# Altium PCB CC1200.PcbDoc
Units mm, origin at the board's own origin, x right, y up, seen from the top; angles counter-clockwise.
Board outline 17.96 x 18.82 mm, 2 copper layers (Top Layer, Bottom Layer); 43 components, 29 nets, 128 pads, 62 vias.
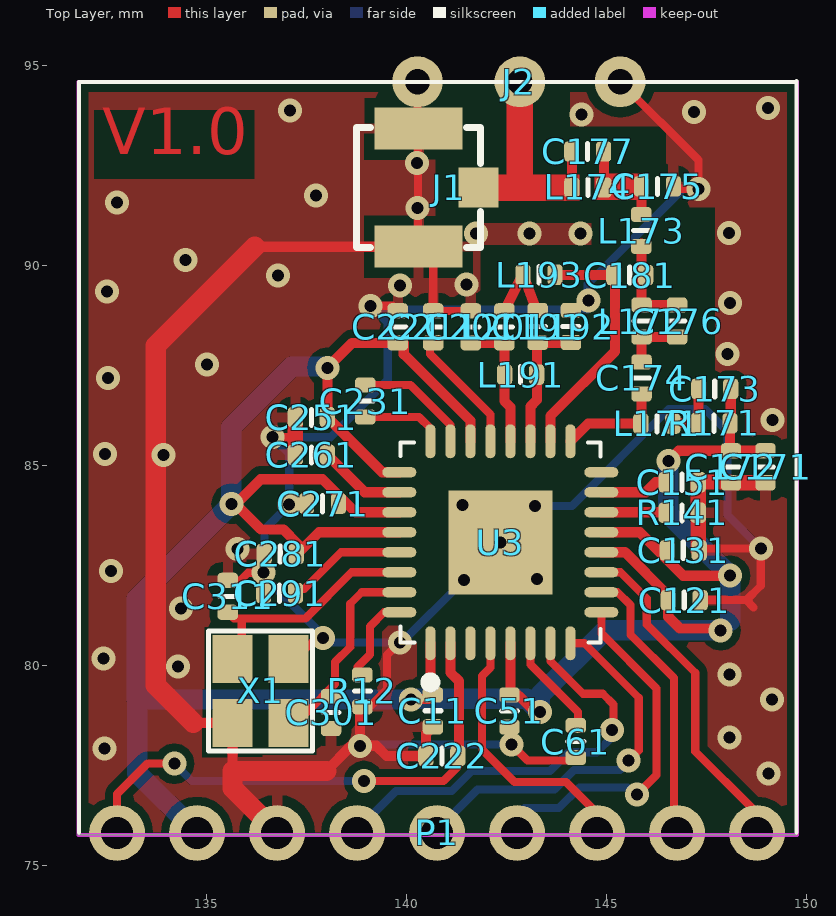
[diagram p0: Top Layer view]
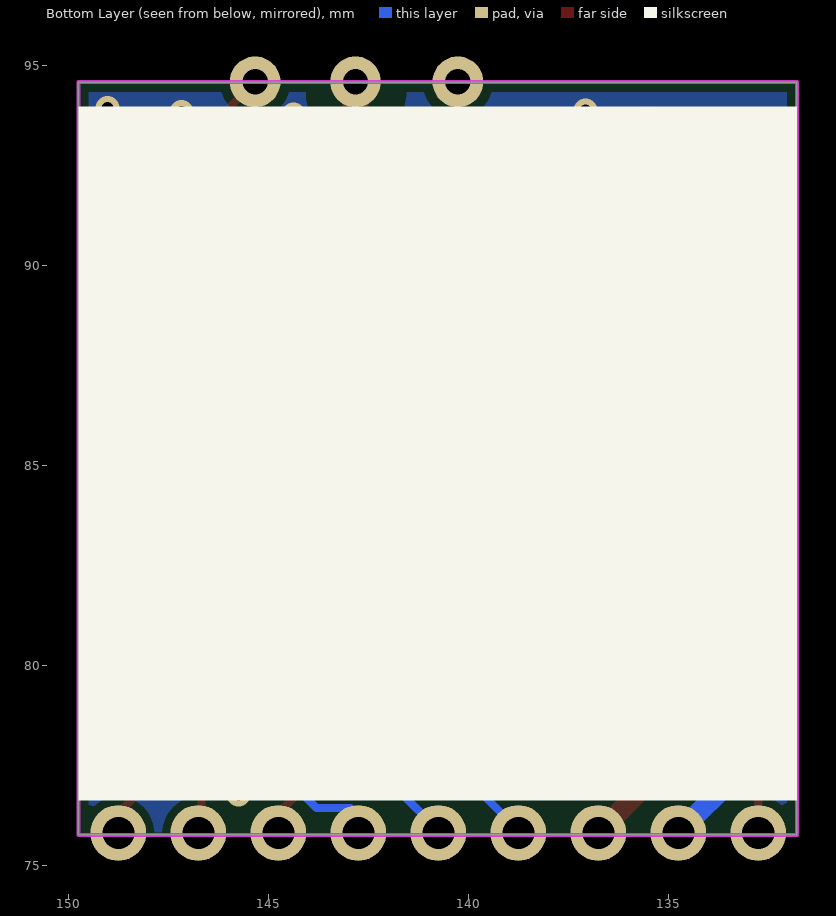
[diagram p1: Bottom Layer view, seen from below]
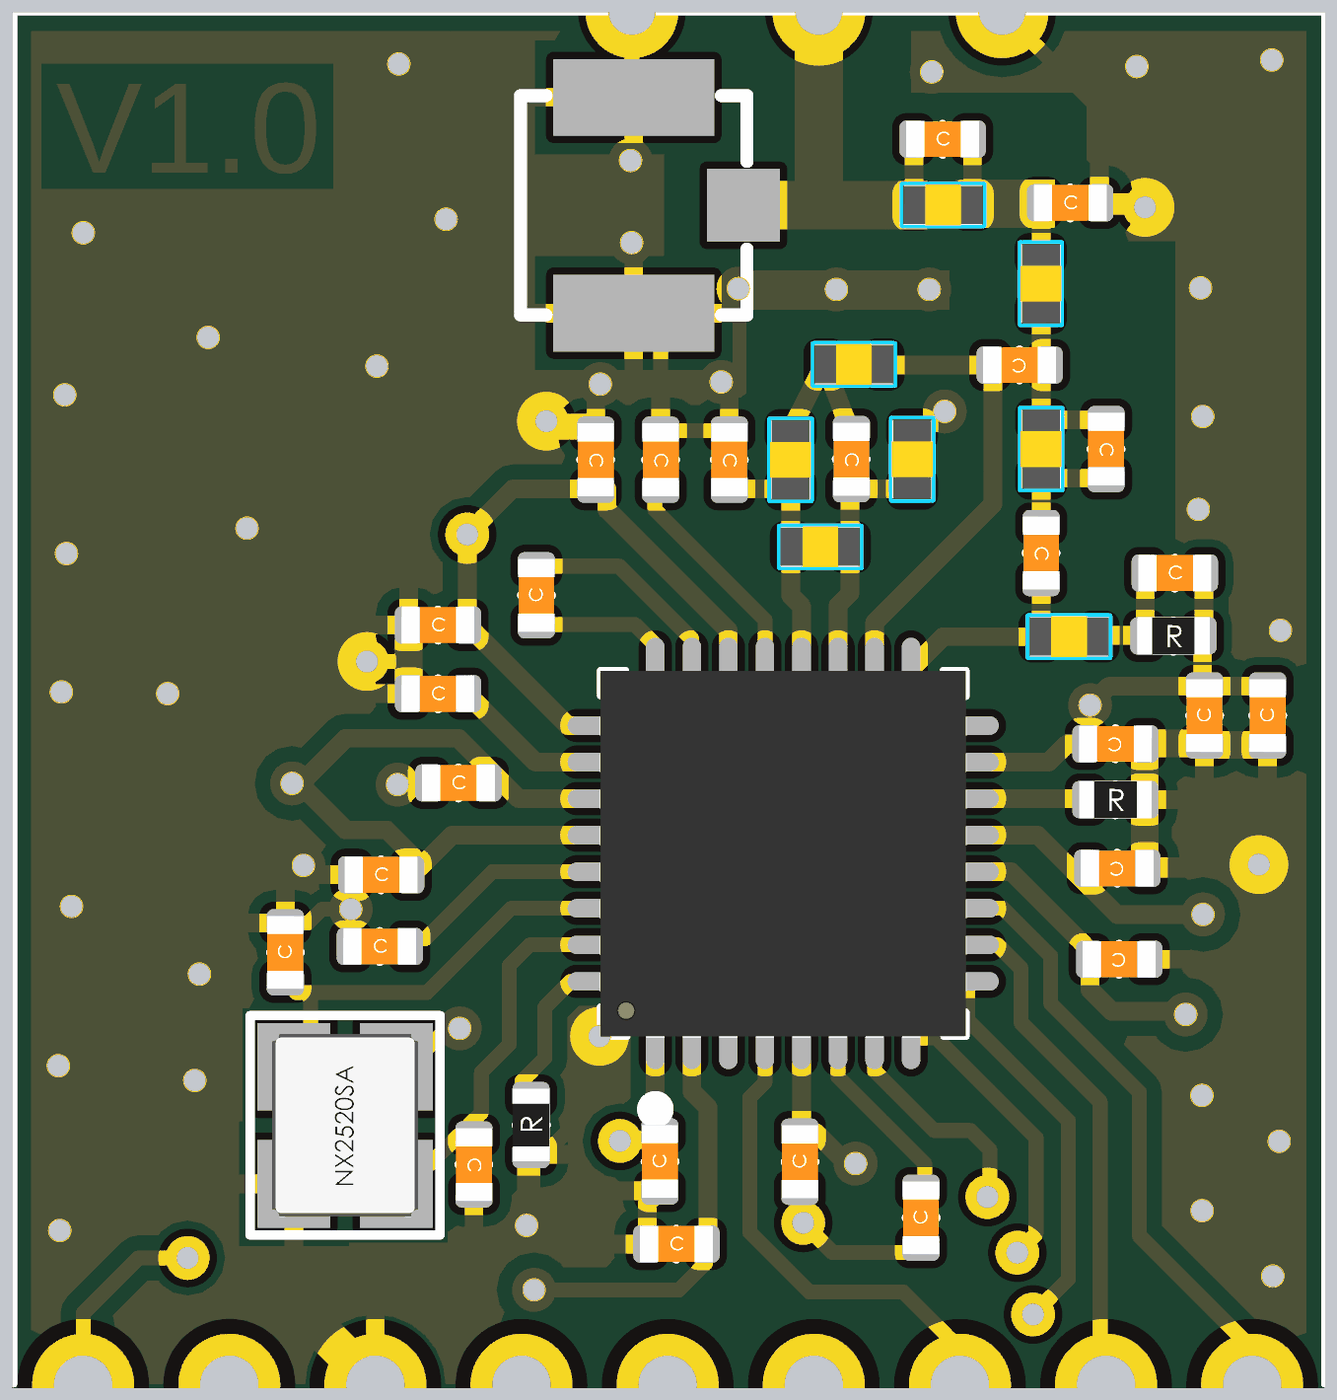
[diagram p2: 3D render of the assembled board from above, using the file's embedded part models]

## Layer stack, top to bottom
Top Solder: solder mask 0.0102, Solder Resist, Dk 3.5
Top Layer: signal copper 0.0356
Dielectric 1: dielectric 0.32, FR-4, Dk 4.8
Bottom Layer: signal copper 0.0356
Bottom Solder: solder mask 0.0102, Solder Resist, Dk 3.5

## Board outline
131.793,75.769 131.793,94.589 149.758,94.589 149.758,75.769

## Design rules (kind name [scope] priority, off if disabled: settings)
Clearance [All] p1: gap=0.203
PolygonConnect PolygonConnect_1 [All vs isvia] p1: connectstyle=Direct reliefconductorwidth=0.254 reliefentries=4 polygonreliefangle="90 Angle" airgapwidth=0.254
PolygonConnect [All] p2: connectstyle=Relief reliefconductorwidth=0.254 reliefentries=4 polygonreliefangle="90 Angle" airgapwidth=0.254
RoutingVias [All] p1: holewidth=0.3 width=0.6 viastyle="Through Hole" minholewidth=0.3 minwidth=0.6 maxholewidth=0.3 maxwidth=0.6
SolderMaskExpansion Via [IsVia] p1: expansion=-0.5
SolderMaskExpansion [All] p2: expansion=0.102
Width [All] p1: maxlimit=0.762 minlimit=0.203 preferedwidth=0.5
30 further rules are at their usual default settings.

## Components (designator, comment, footprint, x,y, rotation, side; value= is the part's Value field where it differs from the comment)
C11 "47nF" "C0402 - SMT - Rounded" 140.654,78.871 r270 top
C51 "47nF" "C0402 - SMT - Rounded" 142.57,78.867 r270 top
C61 "220nF" "C0402 - SMT - Rounded" 144.227,78.101 r270 top
C121 "47nF" "C0402 - SMT - Rounded" 146.939,81.636 r0 top
C131 "47nF" "C0402 - SMT - Rounded" 146.914,82.88 r0 top
C151 "47nF" "C0402 - SMT - Rounded" 146.888,84.582 r0 top
C171 "10nF" "C0402 - SMT - Rounded" 148.971,84.969 r270 top
C172 "100pF" "C0402 - SMT - Rounded" 148.107,84.969 r270 top
C173 "56pF" "C0402 - SMT - Rounded" 147.701,86.919 r180 top
C174 "39pF" "C0402 - SMT - Rounded" 145.872,87.192 r90 top
C175 "6.2pF" "C0402 - SMT - Rounded" 146.27,91.982 r180 top
C176 "2.2pF" "C0402 - SMT - Rounded" 146.761,88.614 r90 top
C177 "DNM" "C0402 - SMT - Rounded" 144.524,92.853 r180 top
C181 "5.1pF" "C0402 - SMT - Rounded" 145.577,89.763 r0 top
C191 "5.1pF" "C0402 - SMT - Rounded" 143.274,88.476 r90 top
C201 "5.1pF" "C0402 - SMT - Rounded" 141.605,88.468 r90 top
C211 "10nF" "C0402 - SMT - Rounded" 140.665,88.468 r90 top
C221 "47nF" "C0402 - SMT - Rounded" 139.776,88.468 r90 top
C222 "100nF-16V" "C0402 - SMT - Rounded" 140.88,77.741 r180 top
C231 "1.5nF" "C0402 - SMT - Rounded" 138.963,86.614 r270 top
C251 "47nF" "C0402 - SMT - Rounded" 137.617,86.208 r180 top
C261 "47nF" "C0402 - SMT - Rounded" 137.617,85.268 r180 top
C271 "47nF" "C0402 - SMT - Rounded" 137.897,84.049 r180 top
C281 "47nF" "C0402 - SMT - Rounded" 136.839,82.792 r180 top
C291 "47nF" "C0402 - SMT - Rounded" 136.821,81.812 r180 top
C301 "15pF" "C0402 - SMT - Rounded" 138.11,78.83 r90 top
C311 "15pF" "C0402 - SMT - Rounded" 135.528,81.731 r270 top
J1 "IPEX" IPEX 141.046,91.948 r90 top
J2 "ANT" ANT 144.83,94.595 r270 top
L171 "56nH" "L0402 - SMT - Rounded" 146.253,86.049 r180 top
L172 "15nH" "L0402 - SMT - Rounded" 145.872,88.614 r270 top
L173 "43nH" "L0402 - SMT - Rounded" 145.866,90.877 r270 top
L174 "22nH" "L0402 - SMT - Rounded" 144.53,91.953 r0 top
L191 "56nH" "L0402 - SMT - Rounded" 142.85,87.274 r0 top
L192 "27nH" "L0402 - SMT - Rounded" 144.106,88.476 r90 top
L193 "15nH" "L0402 - SMT - Rounded" 143.309,89.77 r180 top
L201 "27nH" "L0402 - SMT - Rounded" 142.443,88.468 r90 top
P1 "IO" 9_PIN_2mm 132.761,75.816 r0 top locked
R12 "0R-1%" "R0402 - SMT - Rounded" 138.891,79.368 r90 top
R141 "56k" "R0402 - SMT - Rounded" 146.888,83.82 r0 top
R171 "18R-5%" "R0402 - SMT - Rounded" 147.682,86.06 r0 top
U3 "CC1200" QFN-32M 142.342,83.083 r0 top locked
X1 "40MHz" CRYSTAL-2.5x2-4 136.346,79.365 r90 top

## Footprints (in the part's own frame and the unit in brackets; to place one, negate y for a bottom-side part, rotate by r counter-clockwise, add the part's x,y. Pads: shape width x height; smd on the part's side, far side on the other; paste and mask are expansions set on the pad)
9_PIN_2mm [mil]
  round 55 / inner round 60 / far side round 55 hole 31.5 mask+8: 1(0,0) 2(78.73,0) 3(157.47,0) 4(236.2,0) 5(314.93,0) 6(393.67,0) 7(472.4,0) 8(551.13,0) 9(629.87,0)
ANT [mm]
  round 1.27 hole 0.635 paste+0: 1(0,0.508) 2(0,-2) 3(0,-4.559)
"C0402 - SMT - Rounded" [mm]
  rrect50% 0.381x0.51 smd: 1(0.4,0) 2(-0.4,0)
  silkscreen extent 0,-0.2 0,0.2, body extent -0.5,-0.25 0.5,0.25, height 0.49
CRYSTAL-2.5x2-4 [mm]
  rect 1.2x1 smd: 1(-0.8,-0.7) 2(0.8,-0.7) 3(0.8,0.7) 4(-0.8,0.7)
  silkscreen extent -1.5,-1.3 1.5,1.3, body extent -1.25,-1 1.25,1, height 0.67
IPEX [mm]
  rect 1x1 smd: 1(0,-0.75)
  rect 1.05x2.2 smd: 2(-1.475,0.75) 3(1.475,0.75)
  silkscreen extent -1.5,-0.8 1.5,2.3
"L0402 - SMT - Rounded" [mm]
  rrect50% 0.381x0.51 smd: 1(0.4,0) 2(-0.4,0)
  silkscreen extent 0,-0.2 0,0.21, body extent -0.6,-0.32 0.59,0.32, height 0.67
QFN-32M [mm]
  oval 0.254x0.85 smd: 1(-1.75,-2.525) 2(-1.25,-2.525) 3(-0.75,-2.525) 4(-0.25,-2.525) 5(0.25,-2.525) 6(0.75,-2.525) 7(1.25,-2.525) 8(1.75,-2.525) 17(1.75,2.525) 18(1.25,2.525) 19(0.75,2.525) 20(0.25,2.525) 21(-0.25,2.525) 22(-0.75,2.525) 23(-1.25,2.525) 24(-1.75,2.525)
  oval 0.85x0.254 smd: 9(2.525,-1.75) 10(2.525,-1.25) 11(2.525,-0.75) 12(2.525,-0.25) 13(2.525,0.25) 14(2.525,0.75) 15(2.525,1.25) 16(2.525,1.75) 25(-2.525,1.75) 26(-2.525,1.25) 27(-2.525,0.75) 28(-2.525,0.25) 29(-2.525,-0.25) 30(-2.525,-0.75) 31(-2.525,-1.25) 32(-2.525,-1.75)
  rect 2.6x2.6 smd: 33(0,0)
  silkscreen extent -2.5,-3.62 2.5,2.5, body extent -2.51,-2.52 2.51,2.5, height 0.8
"R0402 - SMT - Rounded" [mm]
  rrect50% 0.381x0.51 smd: 1(-0.4,0) 2(0.4,0)
  silkscreen extent 0,-0.21 0,0.2, body extent -0.5,-0.25 0.5,0.25, height 0.36

## Part data
C11 C51 C121 C131 C151 C221 C251 C261 C271 C281 C291: library part 0.047µF-16V-C0402-10%, "CAP CER 0.047UF 16V 10% X7R 0402"
C61: library part 0.22µF-10V-C0402-10%, "CAP CER 0.22UF 10V 10% X5R 0402"
C171: library part 5.0pF-50V-C0402-0.25pF, "CAP CER 10000PF 25V X7R 0402"
C172: library part 5.0pF-50V-C0402-0.25pF, "CAP CER 100PF 50V NP0 0402"
C173: library part 5.0pF-50V-C0402-0.25pF, "CAP CER 56PF 50V NP0 0402"
C174: library part 5.0pF-50V-C0402-0.25pF, "CAP CER 39PF 50V NP0 0402"
C175: library part 5.0pF-50V-C0402-0.25pF, "CAP CER 6.2PF 50V NP0 0402"
C176: library part 5.0pF-50V-C0402-0.25pF, "CAP CER 2.2PF 50V NP0 0402"
C177: library part 5.0pF-50V-C0402-0.25pF, "CAP CER 1500PF 10V U2J 0402"
C181 C191 C201: library part 5.0pF-50V-C0402-0.25pF, "CAP CER 5.1PF 50V NP0 0402"
C211: library part 10nF-16V-C0402-10%, "CAP CER 10000PF 16V 10% X7R 0402"
C222: library part 100nF-16V-C0402, "CAP CER 0.1UF 16V Y5V 0402"
C231: library part 1500pF-50V-C0402-10%, "CAP CER 1500PF 50V 10% X7R 0402"
C301 C311: library part 15pF-50V-C0402-5%, "CAP CER 15PF 50V NP0 0402"
J1 J2: library part "Header 3", "Header, 3-Pin"
L171 L191: library part 8.2nH-500mA-0402, "FIXED IND 56NH 200MA 1.17 OHM"
L172 L193: library part 8.2nH-500mA-0402, "FIXED IND 15NH 460MA 160 MOHM"
L173: library part 8.2nH-500mA-0402, "FIXED IND 43NH 250MA 700 MOHM"
L174: library part 8.2nH-500mA-0402, "FIXED IND 22NH 310MA 300 MOHM"
L192 L201: library part 8.2nH-500mA-0402, "FIXED IND 27NH 280MA 520 MOHM"
P1: library part "Header 9", "Header, 9-Pin"
R12: library part 0.1R-1%-R0402, "RES .10 OHM 1/16W 1% 0402 SMD"
R141: library part Res1, "RES SMD 56K OHM 1% 1/16W 0402"
R171: library part 18R-5%-R0402, "RES 18 OHM 1/16W 5% 0402 SMD"
X1: library part "ZTA Crystal Resonator", "40MHz ±10ppm Crystal 10pF 50 Ohm -40°C ~ 85°C Surface Mount 4-SMD, No Lead (DFN, LCC)"

## Via types
v1: diameter 0.6, hole 0.3, Top Layer to Bottom Layer, 62 vias

## Nets (pads, with @x,y where several pads share a name; then routed paths per layer and width w, separated by ;. In a path a pad name is that pad's centre, name@x,y a point inside that pad or via, vN(x,y) a via of type N, cw(c..) or ccw(c..) an arc to the next point about the centre after c; other vN are vias at no path point)
CSN: P1.9 U3.11 | length 8.4
  Top Layer w0.203: U3.11 145.35,82.333 146.003,81.681 146.003,81.031 147.214,79.82 147.214,77.857 148.679,76.392 P1.9@148.679,75.808
GDO0: P1.8 U3.10 | length 7
  Top Layer w0.203: U3.10 145.275,81.833 145.596,81.512 145.596,80.77 146.679,79.688 P1.8@146.679,75.808
GDO2: P1.7 U3.4 | length 6.7
  Top Layer w0.203: U3.4 142.092,79.953 141.883,79.744 141.883,77.903 142.699,77.087 143.985,77.087 144.679,76.394 P1.7@144.679,75.808
GND: C11.1 C51.1 C61.1 C121.1 C131.1 C151.1 C171.1 C172.1 C175.2 C201.1 C211.1 C221.1 C222.1 C251.1 C261.1 C271.1 C281.1 C291.1 C301.2 C311.2 J1.2 J1.3 J2.1 J2.3 L192.1 P1.3 R12.1 R141.2 U3.33 X1.2 X1.4 | length 93.4
  Top Layer w0.203: C311.2 135.842,82.131 136.033,82.321 v1(136.423,82.321) ; v1(136.645,85.709) 137.175,85.709 137.217,85.751 ; X1.2@137.276,80.226 137.74,80.69 v1(137.914,80.69) ; 138.855,78.754 139.511,79.41 139.511,80.266 v1(139.827,80.582) ; v1(139.101,88.996) C221.1@139.649,88.996 ; J2.3 140.271,93.433 140.281,93.423 140.281,90.726 140.665,90.341 C211.1 C201.1 ; v1(142.615,78.03) 143.021,77.624 C61.1@144.174,77.624 ; J2.1 147.293,92.64 v1(147.293,91.92) 146.732,91.92 C175.2 ; C121.1 148.492,81.636 ; C131.1@147.364,82.931 v1(148.852,82.931) 148.852,81.995 148.492,81.636 ; 148.673,81.455 148.492,81.636
  Top Layer w0.254: 134.667,78.565 X1.4 135.646,77.364 ; 136.203,90.473 J1.2 ; 137.987,77.364 138.618,77.996 v1(138.83,77.996) ; R12.1@138.83,78.917 v1(138.83,77.996) ; C11.1 140.48,78.296 C222.1 139.496,77.741 139.242,77.996 v1(138.83,77.996)
  Top Layer w0.381: C261.1 137.217,85.751 C251.1 ; C151.1 R141.2 147.288,82.879 C131.1@147.3,82.867 ; C151.1@147.35,84.587 148.09,84.587 C172.1 C171.1
  Top Layer w0.508: 134.667,78.565 133.725,79.507 133.725,87.995 136.203,90.473 ; P1.3 135.646,76.93 135.646,77.364 137.987,77.364
  Bottom Layer w0.203: P1.3 P1.3@136.761,75.926 ; v1(139.101,88.996) v1@139.196,88.9 ; v1@139.119,78.03 v1(142.615,78.03) ; v1(141.432,82.135) 139.871,80.574 138.087,80.574 136.443,82.218 136.443,83.404 v1(137.064,84.025) 137.064,85.29 v1(136.645,85.709) 138.094,85.709 139.525,87.141 139.525,88.571 v1@139.196,88.9 ; v1(143.21,83.994) 144.135,83.994 146.551,86.41 147.458,86.41 148.019,85.849 148.019,83.764 v1(148.852,82.931) ; v1(147.293,91.92) 146.909,91.92 144.526,89.537 144.526,88.9 v1@139.196,88.9
  other v1: 149.042,77.303 132.44,77.926 148.074,78.198 149.13,79.146 148.072,79.774 134.289,79.979 132.422,80.18 134.353,81.433 143.264,82.162 132.602,82.36 135.775,82.92 142.342,83.083 141.396,84.012 133.918,85.269 132.463,85.292 149.146,86.134 132.533,87.185 135.003,87.532 148.023,87.789 148.082,89.059 144.551,89.129 132.51,89.356 139.838,89.502 141.493,89.532 136.781,89.748 134.472,90.141 141.729,90.808 143.07,90.797 144.34,90.797 148.053,90.817 140.267,91.438 132.764,91.572 137.728,91.757 140.252,92.561 144.374,93.772 147.181,93.846 137.081,93.881 149.028,93.935
NetC61_2: C61.2 U3.6 | length 2.6
  Top Layer w0.203: U3.6 143.092,80.024 144.279,78.836 C61.2@144.279,78.44
NetC173_1: C173.1 L171.2 R171.1 | length 1.4
  Top Layer w0.254: L171.2@146.777,86.077 146.788,86.065 147.204,86.065 147.21,86.06 R171.1 ; R171.1@147.295,86.055 147.295,86.06 147.298,86.462 C173.1
NetC174_1: C174.1 C176.2 L172.1 | length 1.5
  Top Layer w0.254: C174.1 L172.1 C176.2
NetC174_2: C174.2 L171.1 U3.17 | length 2.7
  Top Layer w0.254: U3.17 144.532,86.049 L171.1 145.872,86.068 C174.2
NetC175_1: C175.1 C177.2 L173.2 L174.1 | length 1.5
  Top Layer w0.254: L174.1@144.932,91.953 C177.2@144.932,92.853 ; L173.2@145.872,91.351 C175.1@145.872,91.982
NetC176_1: C176.1 C181.1 L172.2 L173.1 | length 2.4
  Top Layer w0.254: L173.1@145.872,90.551 L172.2 C176.1
NetC177_1: C177.1 J1.1 J2.2 L174.2 | length 3.5
  Top Layer w0.254: L174.2@144.132,91.953 C177.1@144.132,92.853
  Top Layer w0.66: J2.2 142.83,91.967 142.837,91.96
NetC181_2: C181.2 L193.2 U3.18 | length 6.4
  Top Layer w0.254: U3.18 143.592,86.238 145.212,87.859 145.212,89.637 C181.2@145.085,89.763 ; L193.2 143.717,89.763 C181.2@145.085,89.763 ; C181.2@145.07,89.779 C181.2@145.085,89.763 ; C181.2 C181.2@145.085,89.763
NetC191_1: C191.1 L193.1 L201.1 | length 2
  Top Layer w0.254: L201.1 142.9,89.775 142.907,89.789 142.913,89.772 C191.1@143.256,88.869
NetC191_2: C191.2 L191.1 L192.2 U3.19 | length 3.4
  Top Layer w0.254: U3.19 143.092,86.475 143.256,86.639 143.256,88.068 L192.2@144.094,88.068
NetC201_2: C201.2 L191.2 L201.2 U3.20 | length 3.4
  Top Layer w0.254: C201.2 L201.2 142.443,86.614 142.592,86.466 U3.20
NetC211_2: C211.2 U3.21 | length 3
  Top Layer w0.203: C211.2@140.586,87.989 140.586,87.786 142.092,86.28 U3.21
NetC231_1: C231.1 U3.24 | length 2.1
  Top Layer w0.203: C231.1 140.312,86.214 140.592,85.934 U3.24
NetC231_2: C231.2 U3.23 | length 2.9
  Top Layer w0.203: C231.2 140.095,87.014 141.092,86.017 U3.23
NetC261_2: C261.2 U3.26 | length 2.2
  Top Layer w0.254: C261.2 138.952,84.333 U3.26
NetC291_2: C291.2 U3.29 | length 2.9
  Top Layer w0.203: C291.2@137.255,81.915 137.439,81.915 138.358,82.833 U3.29
NetR12_2: R12.2 U3.32 | length 2.3
  Top Layer w0.203: R12.2@138.766,79.717 138.766,79.967 139.079,80.28 139.079,80.978 139.435,81.333 U3.32
NetR141_1: R141.1 U3.14 | length 1.6
  Top Layer w0.254: U3.14 146.475,83.833 R141.1
RF_RESET: C222.2 P1.1 U3.2 | length 13.3
  Top Layer w0.203: P1.1 132.761,76.794 133.517,77.551 v1(134.191,77.551) ; v1(138.932,77.114) 140.917,77.114 141.28,77.477 C222.2
  Top Layer w0.254: U3.2 141.092,79.829 141.312,79.608 C222.2@141.312,77.741
  Bottom Layer w0.203: v1(134.191,77.551) 134.627,77.114 v1(138.932,77.114)
SCLK: P1.5 U3.8 | length 9.6
  Top Layer w0.203: U3.8 144.44,80.558 145.802,79.197 145.802,77.879 v1(145.546,77.623)
  Bottom Layer w0.203: P1.5@140.679,75.808 141.775,76.904 143.694,76.904 144.182,77.393 145.329,77.393 v1@145.559,77.623
SI: P1.4 U3.7 | length 10.8
  Top Layer w0.203: U3.7 143.592,80.108 144.404,79.296 144.901,79.296 145.169,79.028 145.169,78.366 145.15,78.384 v1(145.136,78.384)
  Bottom Layer w0.203: P1.4@138.68,75.808 139.736,76.865 141.127,76.865 141.627,77.364 143.579,77.364 144.047,77.832 144.753,77.832 145.136,78.215 v1(145.136,78.384)
SO: P1.6 U3.9 | length 9.2
  Top Layer w0.203: U3.9 144.867,80.809 146.245,79.431 146.245,77.261 v1(145.761,76.777)
  Bottom Layer w0.203: P1.6@142.679,75.808 142.679,76.166 142.949,76.436 143.803,76.436 144.324,76.957 145.526,76.957 145.706,76.777 v1(145.761,76.777)
VCC: C11.2 C51.2 C121.2 C131.2 C151.2 C171.2 C172.2 C173.2 C221.2 C251.2 C271.2 C281.2 P1.2 R171.2 U3.1 U3.5 U3.12 U3.13 U3.15 U3.22 U3.25 U3.27 U3.28 | length 74.5
  Top Layer w0.254: v1@135.669,84.09 v1@135.727,84.032 ; v1@135.678,83.983 v1@135.727,84.032 ; U3.28 137.81,83.333 137.281,82.804 137.281,83.039 136.915,83.405 136.354,83.405 v1@135.727,84.032 ; U3.27 138.721,83.833 137.897,84.658 136.352,84.658 v1@135.727,84.032 ; U3.25 139.391,84.833 C251.2 v1(138.017,87.446) 138.64,88.068 C221.2 139.929,88.068 139.929,87.791 ; 139.929,87.782 139.929,87.791 ; v1@140.318,79.168 140.592,79.168 U3.1 ; U3.22 141.592,86.128 139.929,87.791 ; U3.5 142.592,79.288 C51.2 142.786,79.267 143.338,78.715 143.332,78.709 v1@143.358,78.684 ; U3.12 145.461,82.833 C121.2@146.531,81.763 ; U3.13 145.825,83.333 146.914,82.245 v1@148.087,82.245 ; U3.15 145.979,84.333 146.228,84.582 C151.2 146.533,84.626 146.533,85.103 v1(146.541,85.111) 146.799,85.369 C172.2 C172.2@148.114,85.369 ; C121.2 146.539,81.223 146.837,80.924 v1@147.828,80.924 ; R171.2 148.082,85.401 C172.2@148.114,85.369 ; R171.2@148.101,86.062 C173.2 ; C171.2 C172.2@148.114,85.369
  Bottom Layer w0.508: P1.2 133.266,77.31 133.266,79.151 ; v1(135.62,84.041) v1@135.611,84.031 ; v1(138.017,87.446) 138.017,87.477 137.128,87.477 135.611,85.959 v1@135.611,84.031 ; v1(146.541,85.111) 146.541,83.794 v1(148.087,82.249) 148.087,81.118 ; v1(147.849,80.881) 147.854,80.885 144.96,80.885 143.332,79.257 v1(143.332,78.842) 143.006,79.168 140.124,79.168 v1(140.107,79.151) 133.266,79.151 ; 133.266,79.151 133.25,79.151 133.25,81.671 133.266,81.687 ; 133.266,79.151 133.266,81.687 ; 133.266,81.687 v1@135.611,84.031
X_OSC_Q1: C311.1 U3.30 X1.3 | length 5.8
  Top Layer w0.203: C311.1 135.68,81.178 135.876,81.178 ; X1.3@135.876,80.226 135.876,81.178 ; U3.30 138.622,82.333 137.467,81.178 135.876,81.178
X_OSC_Q2: C301.1 U3.31 X1.1 | length 4.8
  Top Layer w0.203: X1.1@137.216,78.845 137.519,78.845 138.212,79.538 138.212,80.089 138.59,80.467 138.59,81.546 138.877,81.833 U3.31
pads on no net: U3.3 U3.16

## Polygon pours and split planes (outlines as drawn)
GND on Top Layer "Top Layer- GND" (solid, pour order 4): 131.829,94.589 149.752,94.589 149.752,75.827 131.829,75.827 131.829,94.589
GND on Bottom Layer "Bot Layer- GND" (solid, pour order 3): 131.829,94.589 149.752,94.589 149.752,75.827 131.829,75.827 131.829,94.589

## Keep-outs
Keep-Out Layer:
  lines w0.1: 131.793,75.769 149.758,75.769 149.758,94.582 149.758,94.589 131.793,94.589 131.793,75.769

## Other copper
Top Layer:
  rectangle net NetC177_1: 141.795,91.621 144.315,92.281
  rectangle net NetC175_1: 144.698,91.638 146.06,92.299
  pour cut-out: 147.709,85.851 147.709,91.454 146.495,91.454 146.495,93.486 144.089,93.486 144.089,94.601 141.684,94.601 141.684,93.486 140.709,93.486 140.709,91.058 144.618,91.058 144.618,90.522 141.838,90.522 141.838,85.851
  pour cut-out: 139.829,85.591 139.829,80.593 144.826,80.593 144.826,85.591
  text "V1.0" at 132.393,92.397 h2
Bottom Layer:
  pour cut-out: 141.554,94.589 141.554,94.37 ccw(c142.85,94.37) 142.85,93.075 ccw(c142.85,94.294) 144.069,94.294 144.069,94.574

## Silkscreen, mask and mechanical layers (free items; w line width, h text height)
Top Overlay:
  lines w0.1: 131.81,75.83 131.81,94.594 149.751,94.594 ; 149.751,75.83 149.751,94.612
Bottom Overlay:
  rectangle: 131.788,76.633 149.759,93.983